# Altium PCB PCB1.PcbDoc
Units mm, origin at the board's own origin, x right, y up, seen from the top; angles counter-clockwise.
Board outline 100.08 x 100.08 mm, 2 copper layers (Top Layer, Bottom Layer); 89 components, 78 nets, 328 pads, 14 vias.
Unrouted connection lines stored in the file: 124.
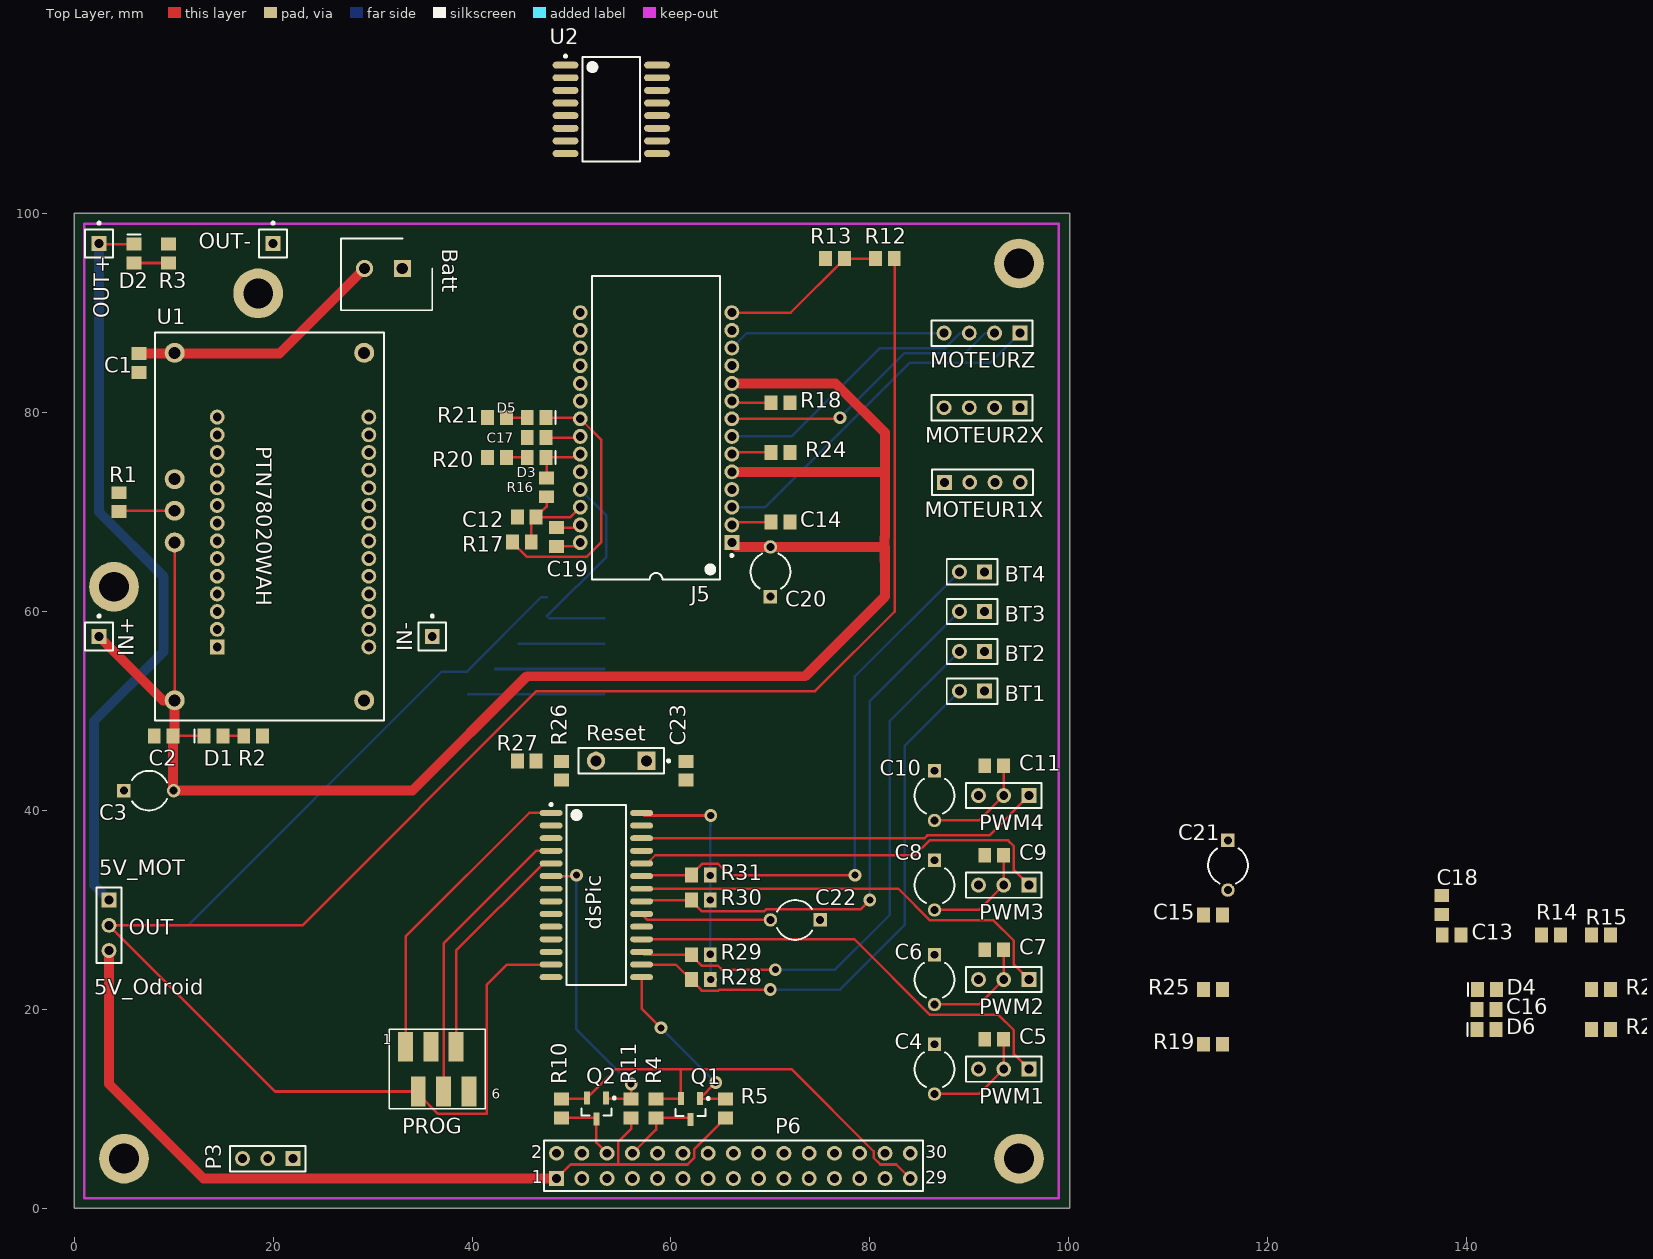
[diagram p0: Top Layer view]
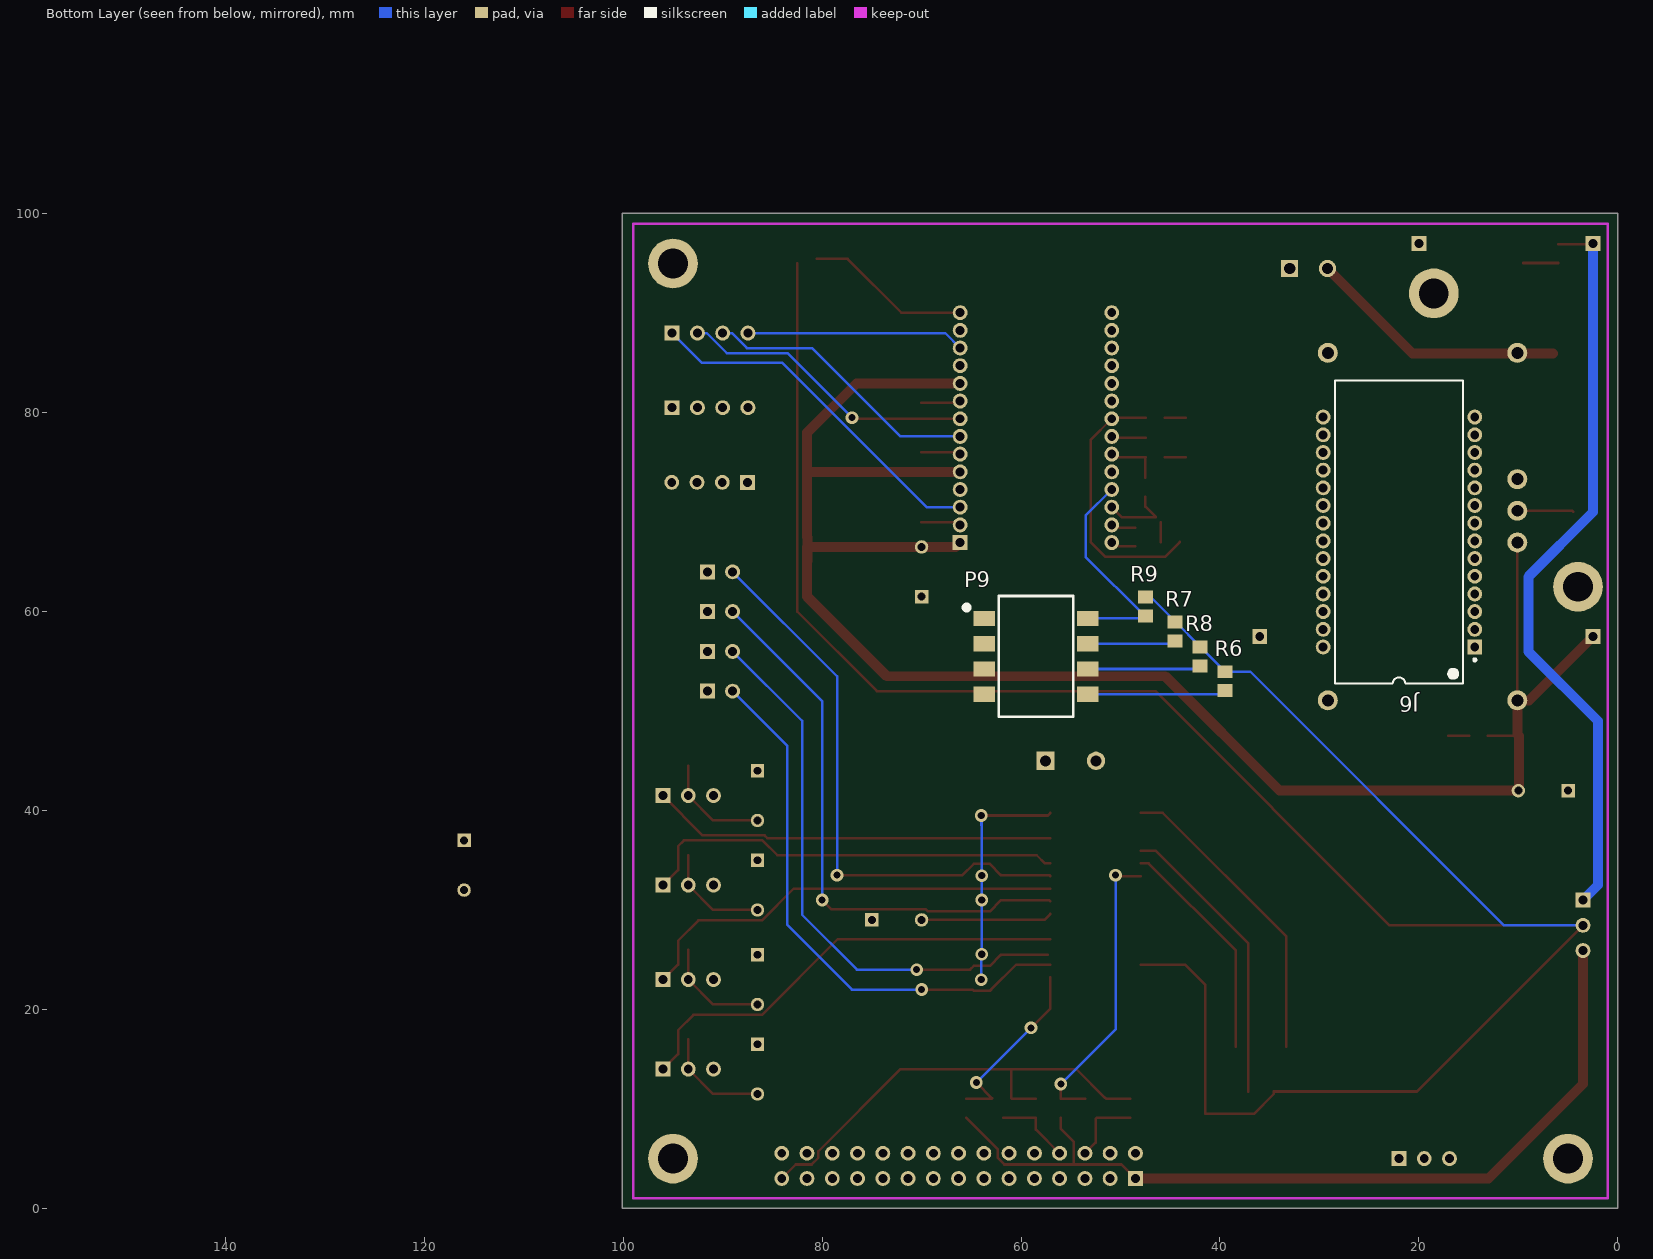
[diagram p1: Bottom Layer view, seen from below]

## Layer stack, top to bottom
Top Solder: solder mask 0.0102, Solder Resist, Dk 3.5
Top Layer: signal copper 0.0356
Dielectric 1: dielectric 0.32, FR-4, Dk 4.8
Bottom Layer: signal copper 0.0356
Bottom Solder: solder mask 0.0102, Solder Resist, Dk 3.5

## Board outline
0,0 100.076,0 100.076,100.076 0,100.076

## Design rules (kind name [scope] priority, off if disabled: settings)
Clearance [All] p1: gap=0.254
HoleToHoleClearance [All] p1: gap=0.178 allowstackedmicrovias=TRUE
MinimumSolderMaskSliver [All] p1: minsoldermaskwidth=0.1
PolygonConnect [All] p1: connectstyle=Relief reliefconductorwidth=0.254 reliefentries=4 polygonreliefangle="90 Angle" airgapwidth=0.254
RoutingVias [All] p1: holewidth=0.711 width=1.27 viastyle="Through Hole" minholewidth=0.711 minwidth=1.27 maxholewidth=0.711 maxwidth=1.27
SolderMaskExpansion [All] p1: expansion=0.102
Width [All] p1: maxlimit=1 minlimit=0.254 preferedwidth=0.254
28 further rules are at their usual default settings.

## Classes and differential pairs
component class Alimentations: Batt C1 C2 C3 D1 D2 IN+ IN- OUT+ OUT- R1 R2 R3 U1
component class Connecteurs: BT1 BT2 BT3 BT4 C4 C5 C6 C7 C8 C9 C10 C11 MOTEUR1_X MOTEUR1X MOTEUR2X MOTEURZ OUT P3 P6 P9 PROG PWM1 PWM2 PWM3 PWM4 Q1 Q2 R4 R5 R6 R7 R8 R9 R10 R11
component class "Controle Moteurs": C12 C13 C14 C15 C16 C17 C18 C19 C20 C21 D3 D4 D5 D6 J5 J6 R12 R13 R14 R15 R16 R17 R18 R19 R20 R21 R22 R23 R24 R25 U2
component class Microcontroleur: C22 C23 dsPic R26 R27 R28 R29 R30 R31 Reset

## Components (designator, comment, footprint, x,y, rotation, side; value= is the part's Value field where it differs from the comment)
Batt "Connecteur Batterie" SHDR2W95P0X381_1X2_901X700X940P 33,94.5 r180 top (schematic designator P1)
BT1 "Bouton Levier" HDR1X2 91.54,52 r180 top (schematic designator P2)
BT2 "Bouton Levier" HDR1X2 91.54,56 r180 top (schematic designator P4)
BT3 "Bouton Levier" HDR1X2 91.54,60 r180 top (schematic designator P5)
BT4 "Bouton Levier" HDR1X2 91.54,64 r180 top (schematic designator P7)
C1 "Cap" 0805 6.5,85 r270 top
C2 "Cap" 0805 9,47.5 r180 top
C3 "Cap2" CAPR5-4X5 7.5,42 r0 top
C4 "Cap2" CAPR5-4X5 86.5,14 r270 top
C5 "Cap" 0805 92.5,17 r180 top
C6 "Cap2" CAPR5-4X5 86.5,23 r270 top
C7 "Cap" 0805 92.5,26 r180 top
C8 "Cap2" CAPR5-4X5 86.5,32.5 r270 top
C9 "Cap" 0805 92.5,35.5 r180 top
C10 "Cap2" CAPR5-4X5 86.5,41.5 r270 top
C11 "Cap" 0805 92.5,44.5 r180 top
C12 "Cap" 0805 45.5,69.5 r180 top
C13 "Cap" 0805 138.5,27.5 r0 top
C14 "Cap" 0805 71,69 r180 top
C15 "Cap" 0805 114.5,29.5 r0 top
C16 "Cap" 0805 142,20 r0 top
C17 "Cap" 0805 46.5,77.5 r180 top
C18 "Cap" 0805 137.5,30.5 r90 top
C19 "Cap" 0805 48.5,67.5 r270 top
C20 "Cap2" CAPR5-4X5 70,64 r90 top
C21 "Cap2" CAPR5-4X5 116,34.5 r270 top
C22 "Cap2" CAPR5-4X5 72.5,29 r180 top
C23 "Cap" 0805 61.5,44 r270 top
D1 "LED" C0805 14,47.5 r0 top
D2 "LED" C0805 6,96 r270 top
D3 "LED" C0805 46.5,75.5 r180 top
D4 "LED" C0805 142.05,22 r0 top
D5 "LED" C0805 46.5,79.5 r180 top
D6 "LED" C0805 142,18 r0 top
dsPic "DSPIC33FJ128MC802T-I/SO" SOIC-SO28_N 52.5,31.5 r0 top (schematic designator U3)
IN+ "Socket" PIN1 2.5,57.5 r0 top (schematic designator J1)
IN- "Socket" PIN1 36,57.5 r0 top (schematic designator J3)
J5 "LV8772" DIP-28/P1.78 58.5,78.5 r180 top
J6 "LV8772" DIP-28/P1.78 22,68 r0 bottom
MOTEUR1X "Moteur1 Axe X" HDR1X4 87.5,73 r0 top (schematic designator MOTEUR1)
MOTEUR2X "Moteur2 Axe X" HDR1X4 95.08,80.5 r180 top (schematic designator MOTEUR2)
MOTEURZ "Moteur Axe Z" HDR1X4 95.08,88 r180 top (schematic designator MOTEUR_Z1)
OUT "Jumper" HDR1X3 3.5,31 r270 top (schematic designator P10)
OUT+ "Socket" PIN1 2.5,97 r0 top (schematic designator J2)
OUT- "Socket" PIN1 20,97 r0 top (schematic designator J4)
P3 "UART2" HDR1X3 22,5 r180 top
P6 "Connecteur Odroid" HDR2X15 48.5,3 r0 top
P9 "Header 4X2A" "Interrupteur coulissant" 58.5,55.5 r180 bottom
PROG "Programmation" 690367280676 36.5,14 r180 top (schematic designator P8)
PWM1 "Servo" HDR1X3 96,14 r180 top
PWM2 "Servo" HDR1X3 96,23 r180 top
PWM3 "Servo" HDR1X3 96,32.5 r180 top
PWM4 "Servo" HDR1X3 96,41.5 r180 top
Q1 "BSS138" SOT23-3_N 61.95,10 r270 top
Q2 "BSS138" SOT23-3_N 52.5,10.05 r270 top
R1 "Res*" 0805 4.5,71 r270 top
R2 "Res*" 0805 18,47.5 r180 top
R3 "Res*" 0805 9.5,96 r90 top
R4 "Res*" 0805 58.5,10.05 r270 top
R5 "Res*" 0805 65.5,10.05 r90 top
R6 "Res*" 0805 39.5,53 r270 bottom
R7 "Res*" 0805 44.5,58 r270 bottom
R8 "Res*" 0805 42,55.5 r270 bottom
R9 "Res*" 0805 47.5,60.5 r270 bottom
R10 "Res*" 0805 49,10.05 r270 top
R11 "Res*" 0805 56,10.05 r90 top
R12 "Res*" 0805 81.5,95.5 r180 top
R13 "Res*" 0805 76.5,95.5 r180 top
R14 "Res*" 0805 148.5,27.5 r180 top
R15 "Res*" 0805 153.5,27.5 r180 top
R16 "Res*" 0805 47.5,72.5 r90 top
R17 "Res*" 0805 45,67 r180 top
R18 "Res*" 0805 71,81 r180 top
R19 "Res*" 0805 114.5,16.5 r0 top
R20 "Res*" 0805 42.5,75.5 r180 top
R21 "Res*" 0805 42.5,79.5 r180 top
R22 "Res*" 0805 153.5,22 r0 top
R23 "Res*" 0805 153.5,18 r0 top
R24 "Res*" 0805 71,76 r180 top
R25 "Res*" 0805 114.5,22 r0 top
R26 "Res1" 0805 49,44 r270 top
R27 "Res1" 0805 45.5,45 r180 top
R28 "Res1" 0805 63,23 r180 top
R29 "Res1" 0805 63,25.5 r180 top
R30 "Res1" 0805 63,31 r180 top
R31 "Res1" 0805 63,33.5 r180 top
Reset "Reset" SPST-2 55,45 r180 top (schematic designator S1)
U1 "PTN78020W" PTN78020WAH 19.5,68.5 r0 top
U2 "SN74HC595N" SOIC-SO16_M 54,110.5 r0 top

## Footprints (in the part's own frame and the unit in brackets; to place one, negate y for a bottom-side part, rotate by r counter-clockwise, add the part's x,y. Pads: shape width x height; smd on the part's side, far side on the other; paste and mask are expansions set on the pad)
0805 [mm] "Chip Resistor; Body 2.0 x 1.3 mm (LxW typ)"
  rect 1.3x1.5 smd: 1(-0.95,0) 2(0.95,0)
690367280676 [mm] "without Latch, 6 pins, SMT, straight"
  rect 1.5x3 smd: 1(3.175,-2.25) 2(1.905,2.25) 3(0.635,-2.25) 4(-0.635,2.25) 5(-1.905,-2.25) 6(-3.175,2.25)
  silkscreen extent -4.81,-4 4.81,4, body extent -4.81,-5 4.81,3.5, height 5.75
C0805 [mm] "Chip Capacitor; Body 2.0 x 1.2 mm (LxW typ)"
  rect 1.3x1.5 smd: 1(-0.95,0) 2(0.95,0)
  silkscreen extent -1.9,-0.65 -1.9,0.65
CAPR5-4X5 [mm] "Capacitor; 2 Leads"
  rect 1.35x1.35 hole 0.8: 1(-2.5,0)
  round 1.35 hole 0.8: 2(2.5,0)
  silkscreen extent -1.69,-2 1.82,2
DIP-28/P1.78 [mm] "DIP, 28-Pin, Row Spacing 15.24 mm, Pitch 1.778 mm"
  rect 1.5x1.5 hole 0.9: 1(-7.62,11.557)
  round 1.5 hole 0.9: 2(-7.62,9.779) 3(-7.62,8.001) 4(-7.62,6.223) 5(-7.62,4.445) 6(-7.62,2.667) 7(-7.62,0.889) 8(-7.62,-0.889) 9(-7.62,-2.667) 10(-7.62,-4.445) 11(-7.62,-6.223) 12(-7.62,-8.001) 13(-7.62,-9.779) 14(-7.62,-11.557) 15(7.62,-11.557) 16(7.62,-9.779) 17(7.62,-8.001) 18(7.62,-6.223) 19(7.62,-4.445) 20(7.62,-2.667) 21(7.62,-0.889) 22(7.62,0.889) 23(7.62,2.667) 24(7.62,4.445) 25(7.62,6.223) 26(7.62,8.001) 27(7.62,9.779) 28(7.62,11.557)
  silkscreen extent -7.75,-15.25 6.45,15.25, body extent -6.68,-15.22 6.68,15.22, height 5.08
HDR1X2 [mm] "Connector; Header; 2 Position"
  rect 1.5x1.5 hole 0.9: 1(0,0)
  round 1.5 hole 0.9: 2(2.54,0)
  silkscreen extent -1.27,-1.27 3.81,1.27
HDR1X3 [mm] "Connector; Header; 3 Position"
  rect 1.5x1.5 hole 0.9: 1(0,0)
  round 1.5 hole 0.9: 2(2.54,0) 3(5.08,0)
  silkscreen extent -1.27,-1.27 6.35,1.27
HDR1X4 [mm] "Connector; Header; 4 Position"
  rect 1.5x1.5 hole 0.9: 1(0,0)
  round 1.5 hole 0.9: 2(2.54,0) 3(5.08,0) 4(7.62,0)
  silkscreen extent -1.27,-1.27 8.89,1.27
HDR2X15 [mm] "Connector; Header; 15x2 Position"
  rect 1.5x1.5 hole 0.9: 1(0,0)
  round 1.5 hole 0.9: 2(0,2.54) 3(2.54,0) 4(2.54,2.54) 5(5.08,0) 6(5.08,2.54) 7(7.62,0) 8(7.62,2.54) 9(10.16,0) 10(10.16,2.54) 11(12.7,0) 12(12.7,2.54) 13(15.24,0) 14(15.24,2.54) 15(17.78,0) 16(17.78,2.54) 17(20.32,0) 18(20.32,2.54) 19(22.86,0) 20(22.86,2.54) 21(25.4,0) 22(25.4,2.54) 23(27.94,0) 24(27.94,2.54) 25(30.48,0) 26(30.48,2.54) 27(33.02,0) 28(33.02,2.54) 29(35.56,0) 30(35.56,2.54)
  silkscreen extent -1.27,-1.27 36.83,3.81
"Interrupteur coulissant" [mm]
  rect 2.16x1.52 smd: 1(-5.21,3.81) 2(-5.21,1.27) 3(-5.21,-1.27) 4(-5.21,-3.81) 5(5.21,-3.81) 6(5.21,-1.27) 7(5.21,1.27) 8(5.21,3.81)
  silkscreen extent -7.22,-6.07 3.75,6.07
PIN1 [mm] "Connector; Plug"
  rect 1.5x1.5 hole 0.9: 1(0,0)
  silkscreen extent -1.4,-1.4 1.4,2.17
PTN78020WAH [mm]
  round 2 hole 1.2: 1(9.652,17.518) 2(-9.398,17.518) 3(-9.398,4.818) 4(-9.398,1.638) 5(-9.398,-1.542) 6(-9.398,-17.422) 7(9.652,-17.422)
  silkscreen extent -11.37,-19.44 11.63,19.56
SHDR2W95P0X381_1X2_901X700X940P [mm]
  rect 1.725x1.725 / inner round 1.725 / far side rect 1.725x1.725 hole 1.15: 1(0,0)
  round 1.725 hole 1.15: 2(3.81,0)
  silkscreen extent -3,-3 6.16,4.2
SOIC-SO16_M [mm] "SOIC, 16-Leads, Body 10.3x7.5mm, Pitch 1.27mm, IPC Low Density"
  oval 2.6x0.7 smd: 1(-4.6,4.445) 2(-4.6,3.175) 3(-4.6,1.905) 4(-4.6,0.635) 5(-4.6,-0.635) 6(-4.6,-1.905) 7(-4.6,-3.175) 8(-4.6,-4.445) 9(4.6,-4.445) 10(4.6,-3.175) 11(4.6,-1.905) 12(4.6,-0.635) 13(4.6,0.635) 14(4.6,1.905) 15(4.6,3.175) 16(4.6,4.445)
  silkscreen extent -4.72,-5.25 2.9,5.47, body extent -3.75,-5.25 3.75,5.25, height 2.65
SOIC-SO28_N [mm] "SOIC, 28-Leads, Body 17.9x7.5mm, Pitch 1.27mm, IPC Medium Density"
  oval 2.3x0.6 smd: 1(-4.55,8.255) 2(-4.55,6.985) 3(-4.55,5.715) 4(-4.55,4.445) 5(-4.55,3.175) 6(-4.55,1.905) 7(-4.55,0.635) 8(-4.55,-0.635) 9(-4.55,-1.905) 10(-4.55,-3.175) 11(-4.55,-4.445) 12(-4.55,-5.715) 13(-4.55,-6.985) 14(-4.55,-8.255) 15(4.55,-8.255) 16(4.55,-6.985) 17(4.55,-5.715) 18(4.55,-4.445) 19(4.55,-3.175) 20(4.55,-1.905) 21(4.55,-0.635) 22(4.55,0.635) 23(4.55,1.905) 24(4.55,3.175) 25(4.55,4.445) 26(4.55,5.715) 27(4.55,6.985) 28(4.55,8.255)
  silkscreen extent -4.67,-9.05 3,9.23, body extent -3.8,-9.06 3.8,9.06, height 2.65
SOT23-3_N [mm] "SOT23, 3-Leads, Body 2.9x1.3mm, Pitch 0.95mm, Lead Span 2.3mm, IPC Medium Density"
  rect 1.3x0.6 smd: 1(-1.05,0.95) 2(-1.05,-0.95) 3(1.05,0)
  silkscreen extent -1.17,-1.5 0.7,1.93, body extent -0.7,-1.5 0.7,1.5, height 1.2
SPST-2 [mm] "Circuit Breaker; 2 Leads"
  rect 1.85x1.85 hole 1.1: 1(-2.54,0)
  round 1.85 hole 1.1: 2(2.54,0)
  silkscreen extent -4.89,-1.27 4.28,1.27

## Part data
Batt BT1 BT2 BT3 BT4: library part "Header 2", "Header, 2-Pin"
C1: "2.2µ"
C2 C5 C7 C9 C11 C12 C13 C14 C15 C18 C19 C23: "100n"
C3: "330µ"
C4 C6 C8 C10: "100µ"
C16 C17: "180p"
C20 C21 C22: "10µ"
D1: library part LED1, "LED Bleu"
D2: library part LED1, "LED Verte"
D3 D4 D5 D6: library part LED1, "LED Rouge"
dsPic: "High-Performance 16-bit Digital Signal Controller, 128 KB Flash, 16 KB RAM, 28-Pin SOIC, Industrial Temperature, Tape and Reel"
J5 J6: "Driver Pas à Pas"
MOTEUR1X MOTEUR2X MOTEURZ: library part "Header 4", "Header, 4-Pin"
OUT P3 PWM1 PWM2 PWM3 PWM4: library part "Header 3", "Header, 3-Pin"
P6: library part "Header 15X2", "Header, 15-Pin, Dual row"
P9: "Header, 4-Pin, Dual row"
PROG: library part "Header 6", "Header, 6-Pin"
Q1 Q2: library part MOSFET-N, "N-Channel MOSFET"
R1: library part Res1, "734R 1%"
R2: library part Res1, "1.2k"
R3 R20 R21 R22 R23: library part Res1, "330R"
R4 R5 R6 R7 R8 R9 R10 R11: library part Res1, "10k"
R12: library part Res1, "2.2k"
R13: library part Res1, "1k"
R14 R15 R16 R17: library part Res1, "47k"
R18 R24: library part Res1, "470m"
R19 R25: library part Res1, "220m"
R26: "470R"
R27 R28 R29 R30 R31: "10k"
Reset: library part SW-PB, "Bouton Reset"
U1: "Alim à découpage 6A"
U2: "8-Bit Shift Register with 3-State Output Registers"

## Free pads (board coordinates)
  round 5 hole 3: 0(4,62.5) 2(5,5) 2(18.5,92) 2(95,5) 2(95,95)

## Via types
v1: diameter 1.27, hole 0.711, Top Layer to Bottom Layer, 14 vias

## Nets (pads, with @x,y where several pads share a name; then routed paths per layer and width w, separated by ;. In a path a pad name is that pad's centre, name@x,y a point inside that pad or via, vN(x,y) a via of type N, cw(c..) or ccw(c..) an arc to the next point about the centre after c; other vN are vias at no path point)
1.8V: P6.29 Q1.2 Q2.2 R4.1 R10.1 | length 46.5
  Top Layer w0.254: R10.1 Q2.2@51.45,11 ; Q2.2 54.45,14 61,14 ; R4.1 Q1.2@60.95,11 ; Q1.2 61,14 ; P6.29 82.651,4.409 81.052,4.409 80.389,5.072 80.389,5.73 72.119,14 61,14
5V_MOTEURS: C6.2 C7.1 C8.2 C9.1 C10.2 C11.1 D2.1 OUT+.1 OUT.1 PWM2.2 PWM3.2 PWM4.2 | length 108.7
  Top Layer w0.254: OUT+.1 2.55,96.95 D2.1 ; C6.2 90.96,20.5 PWM2.2 ; C8.2 90.96,30 PWM3.2 ; C10.2 90.96,39 PWM4.2 C11.1@93.46,44.49 ; PWM2.2@93.45,23.01 C7.1 ; PWM3.2@93.45,32.51 C9.1
  Bottom Layer w1: OUT+.1 2.5,70 9,63.5 9,56 2,49 2,32.5 OUT.1
5V_ODROID: OUT.3 P6.1 R5.1 R11.1 U2.10 | length 87.6
  Top Layer w0.254: P6.1 49.909,4.409 54.711,4.409 ; R11.1 56,8 54.711,6.711 54.711,4.409 ; R5.1 62.331,5.931 62.331,5.072 61.668,4.409 54.711,4.409
  Top Layer w1: OUT.3 3.5,12.5 13,3 P6.1
5V_SWITCH: dsPic.13 dsPic.28 OUT.2 PROG.2 R6.1 R7.1 R8.1 R9.1 R12.1 R26.2 R28.1 R29.1 R30.1 R31.1 U2.16 | length 275.6
  Top Layer w0.254: dsPic.13 43.515,24.515 41.5,22.5 41.5,9.5 36.596,9.5 34.595,11.501 PROG.2 20.21,11.75 OUT.2 22.96,28.46 46.5,52 74.5,52 82.5,60 R12.1@82.5,95 ; dsPic.28 57.305,39.5 v1(64,39.5)
  Bottom Layer w0.254: OUT.2 11.46,28.46 36.95,53.95 R6.1 ; R6.1@39.5,53.989 46.961,61.45 R9.1 ; v1(64,23) 64,25.5 v1(63.95,25.55) v1(63.95,31) v1(63.95,33.45) 63.95,39.45 v1(64,39.5) 64,38.5
12V: C2.1 C3.2 C20.2 C21.2 D1.1 IN+.1 J5.1 J5.5 J5.10 J6.1 J6.5 J6.10 U1.5 U1.6 | length 191.9
  Top Layer w0.254: C2.1 D1.1 ; U1.6 U1.5
  Top Layer w1: IN+.1 8.922,51.078 U1.6 C2.1@10.102,47.652 ; C3.2@9.95,42.05 C2.1 ; C3.2 34,42 45.5,53.5 73.5,53.5 81.5,61.5 81.5,66.5 C20.2 66.563,66.5 J5.1 ; J5.5 81.5,74.055 81.5,78 76.555,82.945 J5.10 ; 81.479,65.1 81.479,67.479 81.5,67.5 ; 81.5,73 81.5,67.5 ; 81.5,76.5 81.5,67.5
EN_MOTOR: J5.15 J6.15 U2.4
GND: Batt.1 BT1.1 BT2.1 BT3.1 BT4.1 C1.2 C2.2 C3.1 C4.1 C5.2 C6.1 C7.2 C8.1 C9.2 C10.1 C11.2 C12.2 C13.2 C14.1 C15.1 C16.2 C17.2 C20.1 C21.1 C22.1 C23.2 dsPic.8 dsPic.19 dsPic.27 IN-.1 J5.4 J5.11 J5.13 J5.20 J6.4 J6.11 J6.13 J6.20 OUT-.1 P3.1 P6.2 P6.28 P6.30 P9.1 P9.2 P9.3 P9.4 PROG.3 PWM1.3 PWM2.3 PWM3.3 PWM4.3 R1.1 R2.1 R3.2 R13.2 R18.1 R19.1 R20.2 R21.2 R22.2 R23.2 R24.1 R25.1 U1.1 U1.7 U2.8 U2.13
MD1_X: J6.16 U2.15
MD1_Z: J5.16 U2.2
MD2_X: J6.17 U2.1
MD2_Z: J5.17 U2.3
NetBatt_2: Batt.2 C1.1 U1.2 | length 26.3
  Top Layer w1: C1.1 U1.2@10.034,85.95 ; U1.2 U1.2@10.034,85.95 ; Batt.2 20.64,85.95 U1.2@10.034,85.95
NetBT1_2: BT1.2 dsPic.16 R28.2 | length 56.1
  Top Layer w0.254: dsPic.16 60.485,24.515 63,22 63.011,22 63.142,21.869 64.758,21.869 64.889,22 v1(70,22)
  Bottom Layer w0.254: v1(70,22) 77,22 83.5,28.5 83.5,46.5 BT1.2
NetBT2_2: BT2.2 dsPic.17 R29.2 | length 57
  Top Layer w0.254: dsPic.17@57.335,25.5 R29.2 62.05,25.461 63.142,24.369 64.758,24.369 65.127,24 v1(70.5,24)
  Bottom Layer w0.254: v1(70.5,24) 76.5,24 82,29.5 82,49 BT2.2
NetBT3_2: BT3.2 dsPic.21 R30.2 | length 56.7
  Top Layer w0.254: dsPic.21 57.185,31 R30.2 62.05,30.961 63.142,29.869 69.376,29.869 69.563,30.056 70.437,30.056 79.056,30.056 v1(80,31)
  Bottom Layer w0.254: v1(80,31) 80,51 BT3.2
NetBT4_2: BT4.2 dsPic.23 R31.2 | length 57.3
  Top Layer w0.254: dsPic.23 57.145,33.5 R31.2 62.05,33.539 63.142,34.631 64.758,34.631 65.889,33.5 v1(78.5,33.5)
  Bottom Layer w0.254: v1(78.5,33.5) 78.5,53.5 BT4.2
NetC12_1: C12.1 J5.26 R16.1 R17.1 | length 9.3
  Top Layer w0.254: R17.1 C12.1@45.95,69 ; R16.1 47.5,70.55 C12.1 49.881,69.5 J5.26
NetC13_1: C13.1 J6.26 R14.1 R15.1
NetC14_2: C14.2 J5.2 | length 3.7
  Top Layer w0.254: J5.2@66.399,69 C14.2
NetC15_2: C15.2 J6.2
NetC16_1: C16.1 J6.22
NetC17_1: C17.1 J5.22 | length 3.3
  Top Layer w0.254: C17.1 J5.22@50.769,77.5
NetC18_1: C18.1 J6.27
NetC18_2: C18.2 J6.28
NetC19_1: C19.1 J5.27 | length 2.1
  Top Layer w0.254: C19.1 J5.27@50.609,68.45
NetC19_2: C19.2 J5.28 | length 2
  Top Layer w0.254: C19.2 J5.28@50.487,66.55
NetC22_2: C22.2 dsPic.20 | length 13.2
  Top Layer w0.254: dsPic.20 57.639,29.006 58.182,29.006 58.188,29 C22.2 C22.2@70,29.006
NetC23_1: C23.1 Reset.1
NetD1_2: D1.2 R2.2 | length 2.1
  Top Layer w0.254: D1.2 R2.2
NetD2_2: D2.2 R3.1 | length 3.5
  Top Layer w0.254: D2.2 R3.1
NetD3_1: D3.1 J5.23 R16.2 | length 5.1
  Top Layer w0.254: D3.1 J5.23@50.547,75.5 ; R16.2 D3.1@47.5,75.45
NetD3_2: D3.2 R20.1 | length 2.1
  Top Layer w0.254: R20.1 D3.2
NetD4_1: D4.1 J6.23 R14.2
NetD4_2: D4.2 R22.1
NetD5_1: D5.1 J5.21 R17.2 | length 26.8
  Top Layer w0.254: R17.2 44.05,66.961 45.511,65.5 51.5,65.5 53,67 53,77.269 J5.21 ; D5.1 J5.21@50.769,79.5
NetD5_2: D5.2 R21.1 | length 2.1
  Top Layer w0.254: R21.1 D5.2
NetD6_1: D6.1 J6.21 R15.2
NetD6_2: D6.2 R23.1
NetdsPic_1: dsPic.1 PROG.1 R27.2 | length 30.8
  Top Layer w0.254: PROG.1 33.325,27.325 45.755,39.755 dsPic.1
NetdsPic_2: dsPic.2 J6.18
NetdsPic_3: dsPic.3 J6.19
NetdsPic_4: dsPic.4 PROG.4 | length 29.6
  Top Layer w0.254: PROG.4 37.135,26.635 46.445,35.945 dsPic.4
NetdsPic_5: dsPic.5 PROG.5 | length 22.8
  Top Layer w0.254: PROG.5 38.405,25.905 47.175,34.675 dsPic.5
NetdsPic_6: dsPic.6 Q2.1 R11.2 | length 29.8
  Top Layer w0.254: dsPic.6 50.405,33.405 v1(50.5,33.5) ; Q2.1@53.55,11 R11.2 v1(56,12.5)
  Bottom Layer w0.254: v1(50.5,33.5) 50.5,18 v1(56,12.5)
NetdsPic_7: dsPic.7 P3.2
NetdsPic_9: dsPic.9 J5.18
NetdsPic_10: dsPic.10 J5.19
NetdsPic_11: dsPic.11 P3.3
NetdsPic_12: dsPic.12 U2.12
NetdsPic_14: dsPic.14 U2.14
NetdsPic_15: dsPic.15 Q1.1 R5.2 | length 18.5
  Top Layer w0.254: dsPic.15 57.05,20.1 v1(59,18.15) ; Q1.1 v1(64.5,12.65) ; Q1.1@62.95,11 R5.2
  Bottom Layer w0.254: v1(59,18.15) v1(64.5,12.65)
NetdsPic_18: dsPic.18 PWM1.1 | length 45.8
  Top Layer w0.254: dsPic.18 78.452,27.055 86.063,19.444 92.945,19.444 94.481,17.908 94.481,15.519 PWM1.1
NetdsPic_22: dsPic.22 PWM2.1 | length 44.1
  Top Layer w0.254: dsPic.22 82.872,32.135 86.063,28.944 92.445,28.944 94.481,26.908 94.481,24.519 PWM2.1
NetdsPic_24: dsPic.24 PWM3.1 | length 43.2
  Top Layer w0.254: dsPic.24 57.593,34.675 58.418,35.5 84.5,35.5 86,37 93.889,37 94.481,36.408 94.481,34.019 PWM3.1
NetdsPic_25: dsPic.25 U2.11
NetdsPic_26: dsPic.26 PWM4.1 | length 40.7
  Top Layer w0.254: dsPic.26 85.497,37.215 85.79,37.508 92.008,37.508 PWM4.1
NetJ5_3: J5.3 MOTEURZ.1 | length 36.2
  Bottom Layer w0.254: J5.3 69.499,70.499 84,85 92.08,85 MOTEURZ.1
NetJ5_6: J5.6 R24.2 | length 3.8
  Top Layer w0.254: J5.6@66.287,76 R24.2
NetJ5_7: J5.7 MOTEURZ.3 | length 28.2
  Bottom Layer w0.254: J5.7 72.111,77.611 81,86.5 87.559,86.5 89.059,88 MOTEURZ.3
NetJ5_8: J5.8 MOTEURZ.2 | length 30
  Top Layer w0.254: J5.8 76.889,79.389 v1(77,79.5)
  Bottom Layer w0.254: v1(77,79.5) 83.492,85.992 89.591,85.992 91.599,88 MOTEURZ.2
NetJ5_9: J5.9 R18.2 | length 3.8
  Top Layer w0.254: J5.9@66.287,81 R18.2
NetJ5_12: J5.12 MOTEURZ.4 | length 22
  Bottom Layer w0.254: J5.12 67.619,88 MOTEURZ.4
NetJ5_14: J5.14 J6.14 R12.2 R13.1 | length 16.7
  Top Layer w0.254: J5.14 72.046,90.057 77.45,95.461 R13.1 R12.2
NetJ5_24: J5.24 P9.6 R8.2 | length 11
  Bottom Layer w0.254: R8.2@42.32,54.23 P9.6
NetJ5_25: J5.25 P9.8 R9.2 | length 21.9
  Bottom Layer w0.254: R9.2 47.539,59.55 53.5,65.511 53.5,69.657 J5.25 ; R9.2@47.76,59.31 P9.8
NetJ6_3: J6.3 MOTEUR1X.1 MOTEUR2X.4
NetJ6_6: J6.6 R25.2
NetJ6_7: J6.7 MOTEUR1X.3 MOTEUR2X.2
NetJ6_8: J6.8 MOTEUR1X.2 MOTEUR2X.3
NetJ6_9: J6.9 R19.2
NetJ6_12: J6.12 MOTEUR1X.4 MOTEUR2X.1
NetJ6_24: J6.24 P9.5 R6.2 | length 13.6
  Bottom Layer w0.254: R6.2@39.64,51.69 P9.5
NetJ6_25: J6.25 P9.7 R7.2 | length 8.6
  Bottom Layer w0.254: R7.2@44.72,56.77 P9.7
NetR1_2: R1.2 U1.4 | length 5.6
  Top Layer w0.254: R1.2 4.588,70.138 U1.4
NetR26_1: R26.1 R27.1 Reset.2
UART1_RX: P6.6 Q2.3 R10.2 | length 7.3
  Top Layer w0.254: R10.2 Q2.3@52.4,9.1 ; Q2.3 52.5,6.62 P6.6
UART1_TX: P6.8 Q1.3 R4.2 | length 7.8
  Top Layer w0.254: P6.8 58.5,7.92 R4.2 Q1.3@61.8,9.1
V?: C4.2 C5.1 PWM1.2 | length 11
  Top Layer w0.254: C4.2 90.96,11.5 PWM1.2 ; PWM1.2@93.45,14.01 C5.1
pads on no net: P6.3 P6.4 P6.5 P6.7 P6.9 P6.10 P6.11 P6.12 P6.13 P6.14 P6.15 P6.16 P6.17 P6.18 P6.19 P6.20 P6.21 P6.22 P6.23 P6.24 P6.25 P6.26 P6.27 PROG.6 U1.3 U2.5 U2.6 U2.7 U2.9

## Keep-outs
Keep-Out Layer:
  lines w0.254: 1,1 1,99 99,99 99,1 1,1

## Silkscreen, mask and mechanical layers (free items; w line width, h text height)
Top Overlay:
  text "5V_MOT" at 2.5,33.5 h1.52
  text "5V_Odroid" at 2,21.5 h1.52

## Text inside footprints (layer, text, board x,y; h text height)
P6: Top Overlay "30" at 85.584,5.032 h1.27; Top Overlay "29" at 85.584,2.492 h1.27; Top Overlay "2" at 45.96,5.032 h1.27; Top Overlay "1" at 46,2.5 h1.27
PROG: Top Overlay "1" at 31,16.5 h1; Top Overlay "6" at 42,11 h1
U1: Top Overlay "PTN78020WAH" at 18.287,76.628 h1.52 r270